# EAGLE board PnP-Interface-V1 (EAGLE 9.3.0)

Size 160 x 100 mm. Coordinates in mm from the lower left corner, seen from the top.
Outline: 0,0 160,0 160,100 0,100 0,0
Copper layers (1*16): Top 0.035mm / dielectric 1.5mm / Bottom 0.035mm
Design rules "default": minimum track width 6mil, minimum drill 0.35mm, track to track 6mil, track to pad 6mil, pad to pad 6mil, via to via 6mil, smd to smd 6mil, copper to edge 40mil, drill to drill 6mil, minimum pad ring 10mil, minimum via ring 8mil, stop-mask expansion 4mil, vias tented up to drill 0mil, thermal gap 10mil

## Footprints (pad centres in the part's own frame; a part is rotated, then mirrored left to right if it is on the bottom)
2X12 = drill 1.016 octagon: 1 -13.97,-1.27; 2 -13.97,1.27; 3 -11.43,-1.27; 4 -11.43,1.27; 5 -8.89,-1.27; 6 -8.89,1.27; 7 -6.35,-1.27; 8 -6.35,1.27; 9 -3.81,-1.27; 10 -3.81,1.27; 11 -1.27,-1.27; 12 -1.27,1.27; 13 1.27,-1.27; 14 1.27,1.27; 15 3.81,-1.27; 16 3.81,1.27; 17 6.35,-1.27; 18 6.35,1.27; 19 8.89,-1.27; 20 8.89,1.27; 21 11.43,-1.27; 22 11.43,1.27; 23 13.97,-1.27; 24 13.97,1.27
2X25 = drill 1.016 octagon: 1 -30.48,-1.27; 2 -30.48,1.27; 3 -27.94,-1.27; 4 -27.94,1.27; 5 -25.4,-1.27; 6 -25.4,1.27; 7 -22.86,-1.27; 8 -22.86,1.27; 9 -20.32,-1.27; 10 -20.32,1.27; 11 -17.78,-1.27; 12 -17.78,1.27; 13 -15.24,-1.27; 14 -15.24,1.27; 15 -12.7,-1.27; 16 -12.7,1.27; 17 -10.16,-1.27; 18 -10.16,1.27; 19 -7.62,-1.27; 20 -7.62,1.27; 21 -5.08,-1.27; 22 -5.08,1.27; 23 -2.54,-1.27; 24 -2.54,1.27; 25 0,-1.27; 26 0,1.27; 27 2.54,-1.27; 28 2.54,1.27; 29 5.08,-1.27; 30 5.08,1.27; 31 7.62,-1.27; 32 7.62,1.27; 33 10.16,-1.27; 34 10.16,1.27; 35 12.7,-1.27; 36 12.7,1.27; 37 15.24,-1.27; 38 15.24,1.27; 39 17.78,-1.27; 40 17.78,1.27; 41 20.32,-1.27; 42 20.32,1.27; 43 22.86,-1.27; 44 22.86,1.27; 45 25.4,-1.27; 46 25.4,1.27; 47 27.94,-1.27; 48 27.94,1.27; 49 30.48,-1.27; 50 30.48,1.27
2X06 = drill 1.016 octagon: 1 -6.35,-1.27; 2 -6.35,1.27; 3 -3.81,-1.27; 4 -3.81,1.27; 5 -1.27,-1.27; 6 -1.27,1.27; 7 1.27,-1.27; 8 1.27,1.27; 9 3.81,-1.27; 10 3.81,1.27; 11 6.35,-1.27; 12 6.35,1.27
1X05 = drill 1.016 long: 1 -5.08,0; 2 -2.54,0; 3 0,0; 4 2.54,0; 5 5.08,0
2X04 = drill 1.016 octagon: 1 -3.81,-1.27; 2 -3.81,1.27; 3 -1.27,-1.27; 4 -1.27,1.27; 5 1.27,-1.27; 6 1.27,1.27; 7 3.81,-1.27; 8 3.81,1.27

## Placement (x,y rotation side)
EXPANSION-1  [2X12]  -29.21,11.43 0 top  (outside the outline)
EXPANSION-2  [2X12]  -29.21,19.05 0 top  (outside the outline)
EXPANSION-HEADER  [2X25]  -45.72,3.81 0 top  (outside the outline)
POWER-EXPANSION  [2X06]  -24.13,26.67 0 top  (outside the outline)
TFT-DISPLAY  [1X05]  -20.32,34.29 0 top  (outside the outline)
WIFI  [2X04]  -38.1,26.67 0 top  (outside the outline)

## Library data of the parts
EXPANSION-1 EXPANSION-2 EXPANSION-HEADER POWER-EXPANSION TFT-DISPLAY WIFI = pinhead

## Nets
485_1_RTS: EXPANSION-2.7 EXPANSION-HEADER.28
485_1_RXI: EXPANSION-2.5 TFT-DISPLAY.3
485_1_TXO: EXPANSION-2.9 TFT-DISPLAY.2
485_2_RTS: EXPANSION-2.12
485_2_RXI: EXPANSION-2.11
485_2_TXO: EXPANSION-2.13
485_3_RTS: EXPANSION-2.8
485_3_RXI: EXPANSION-2.6
485_3_TXO: EXPANSION-2.10
+3V3: EXPANSION-1.3 EXPANSION-1.22 EXPANSION-2.3 EXPANSION-2.22 POWER-EXPANSION.1 POWER-EXPANSION.3 WIFI.7
+5V: EXPANSION-1.1 EXPANSION-1.24 EXPANSION-2.1 EXPANSION-2.24 POWER-EXPANSION.5 POWER-EXPANSION.7 TFT-DISPLAY.5
+12V: EXPANSION-1.2 EXPANSION-1.23 EXPANSION-2.2 EXPANSION-2.23 POWER-EXPANSION.9 POWER-EXPANSION.11
DOWN_LIGHT_SIG: EXPANSION-1.8 EXPANSION-HEADER.20
GND: EXPANSION-1.4 EXPANSION-1.19 EXPANSION-1.20 EXPANSION-1.21 EXPANSION-2.4 EXPANSION-2.19 EXPANSION-2.20 EXPANSION-2.21 EXPANSION-HEADER.1 POWER-EXPANSION.2 POWER-EXPANSION.4 POWER-EXPANSION.6 POWER-EXPANSION.8 POWER-EXPANSION.10 POWER-EXPANSION.12 TFT-DISPLAY.4 WIFI.2
MCU_UART_RX: EXPANSION-2.17 WIFI.1 WIFI.8
MCU_UART_TX: EXPANSION-2.15
RESET: TFT-DISPLAY.1
SERVO_1_SIG: EXPANSION-1.9 EXPANSION-HEADER.25
SERVO_2_SIG: EXPANSION-1.10 EXPANSION-HEADER.27
UP_LIGHT_SIG: EXPANSION-1.7 EXPANSION-HEADER.23
VAC_SIG_1: EXPANSION-1.5 EXPANSION-HEADER.46
VAC_SIG_2: EXPANSION-1.6 EXPANSION-HEADER.43

## Tracks (layer width: path | path; a pad name or v marks a point on that pad's centre or on a via)
485_1_RTS  (1 unrouted)
485_1_RXI  (1 unrouted)
485_1_TXO  (1 unrouted)
+3V3  (6 unrouted)
+5V  (6 unrouted)
+12V  (5 unrouted)
DOWN_LIGHT_SIG  (1 unrouted)
GND  (16 unrouted)
MCU_UART_RX  (2 unrouted)
SERVO_1_SIG  (1 unrouted)
SERVO_2_SIG  (1 unrouted)
UP_LIGHT_SIG  (1 unrouted)
VAC_SIG_1  (1 unrouted)
VAC_SIG_2  (1 unrouted)